# EAGLE board bat-brd-rev02-panel (EAGLE 9.6.2)
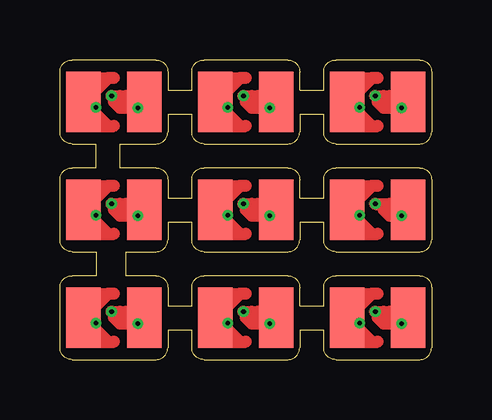
[diagram p0: board, top side]
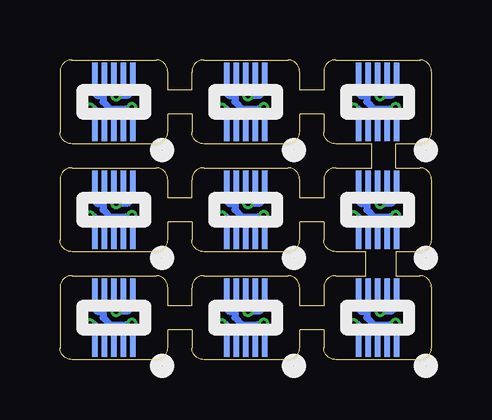
[diagram p1: board, bottom side, seen from below]

Size 15.5 x 12.5 mm. Coordinates in mm from the lower left corner, seen from the top.
Outline: 0.5,0 4,0 arc90 4.5,0.5 4.5,1.25 5.5,1.25 5.5,0.5 arc90 6,0 9.5,0 arc90 10,0.5 10,1.25 11,1.25 11,0.5 arc90 11.5,0 15,0 arc90 15.5,0.5 15.5,3 arc90 15,3.5 11.5,3.5 arc90 11,3 11,2.25 10,2.25 10,3 arc90 9.5,3.5 6,3.5 arc90 5.5,3 5.5,2.25 4.5,2.25 4.5,3 arc90 4,3.5 2.75,3.5 2.75,4.5 4,4.5 arc90 4.5,5 4.5,5.75 5.5,5.75 5.5,5 arc90 6,4.5 9.5,4.5 arc90 10,5 10,5.75 11,5.75 11,5 arc90 11.5,4.5 15,4.5 arc90 15.5,5 15.5,7.5 arc90 15,8 11.5,8 arc90 11,7.5 11,6.75 10,6.75 10,7.5 arc90 9.5,8 6,8 arc90 5.5,7.5 5.5,6.75 4.5,6.75 4.5,7.5 arc90 4,8 2.5,8 2.5,9 4,9 arc90 4.5,9.5 4.5,10.25 5.5,10.25 5.5,9.5 arc90 6,9 9.5,9 arc90 10,9.5 10,10.25 11,10.25 11,9.5 arc90 11.5,9 15,9 arc90 15.5,9.5 15.5,12 arc90 15,12.5 11.5,12.5 arc90 11,12 11,11.25 10,11.25 10,12 arc90 9.5,12.5 6,12.5 arc90 5.5,12 5.5,11.25 4.5,11.25 4.5,12 arc90 4,12.5 0.5,12.5 arc90 0,12 0,9.5 arc90 0.5,9 1.5,9 1.5,8 0.5,8 arc90 0,7.5 0,5 arc90 0.5,4.5 1.5,4.5 1.5,3.5 0.5,3.5 arc90 0,3 0,0.5 arc90 0.5,0
Copper layers (1*16): Top 0.035mm / dielectric 0.53mm / Bottom 0.035mm
Design rules "rules-rev04": minimum track width 5mil, minimum drill 0.2mm, track to track 5mil, track to pad 6mil, pad to pad 6mil, via to via 6mil, smd to smd 6mil, copper to edge 40mil, drill to drill 6mil, minimum pad ring 10mil, minimum via ring 0.125mm, stop-mask expansion 4mil, vias tented up to drill 10000mil, thermal gap 10mil

## Footprints (pad centres in the part's own frame; a part is rotated, then mirrored left to right if it is on the bottom)
1X2_SMD = smd 1.448 x 2.54: 1 -1.27,0; 2 1.27,0
MEZ-DF37C-10DP = smd 0.23 x 1 bottom: P$1 -0.8,-1.14; P$2 -0.4,-1.14; P$3 0,-1.14; P$4 0.4,-1.14; P$5 0.8,-1.14; P$6 0.8,1.14; P$7 0.4,1.14; P$8 0,1.14; P$9 -0.4,1.14; P$10 -0.8,1.14

## Placement (x,y rotation side)
HEDR1  1X02SMD  [1X2_SMD]  2.25,1.75 0 top
HEDR2  1X02SMD  [1X2_SMD]  7.75,1.75 0 top
HEDR3  1X02SMD  [1X2_SMD]  13.25,1.75 0 top
HEDR4  1X02SMD  [1X2_SMD]  2.25,6.25 0 top
HEDR5  1X02SMD  [1X2_SMD]  7.75,6.25 0 top
HEDR6  1X02SMD  [1X2_SMD]  13.25,6.25 0 top
HEDR7  1X02SMD  [1X2_SMD]  2.25,10.75 0 top
HEDR8  1X02SMD  [1X2_SMD]  7.75,10.75 0 top
HEDR9  1X02SMD  [1X2_SMD]  13.25,10.75 0 top
U$1  CON-BAT-TG-MEZ_MALE  [MEZ-DF37C-10DP]  2.25,1.75 0 top
U$2  CON-BAT-TG-MEZ_MALE  [MEZ-DF37C-10DP]  7.75,1.75 0 top
U$3  CON-BAT-TG-MEZ_MALE  [MEZ-DF37C-10DP]  13.25,1.75 0 top
U$4  CON-BAT-TG-MEZ_MALE  [MEZ-DF37C-10DP]  2.25,6.25 0 top
U$5  CON-BAT-TG-MEZ_MALE  [MEZ-DF37C-10DP]  7.75,6.25 0 top
U$6  CON-BAT-TG-MEZ_MALE  [MEZ-DF37C-10DP]  13.25,6.25 0 top
U$7  CON-BAT-TG-MEZ_MALE  [MEZ-DF37C-10DP]  2.25,10.75 0 top
U$8  CON-BAT-TG-MEZ_MALE  [MEZ-DF37C-10DP]  7.75,10.75 0 top
U$9  CON-BAT-TG-MEZ_MALE  [MEZ-DF37C-10DP]  13.25,10.75 0 top

## Library data of the parts
HEDR1-HEDR9 U$1-U$9 = 0TG-Lib v01.5

## Nets
GND: HEDR1.2 U$1.P$4 U$1.P$5 U$1.P$9 U$1.P$10
GND1: HEDR2.2 U$2.P$4 U$2.P$5 U$2.P$9 U$2.P$10
GND2: HEDR3.2 U$3.P$4 U$3.P$5 U$3.P$9 U$3.P$10
GND3: HEDR4.2 U$4.P$4 U$4.P$5 U$4.P$9 U$4.P$10
GND4: HEDR5.2 U$5.P$4 U$5.P$5 U$5.P$9 U$5.P$10
GND5: HEDR6.2 U$6.P$4 U$6.P$5 U$6.P$9 U$6.P$10
GND6: HEDR7.2 U$7.P$4 U$7.P$5 U$7.P$9 U$7.P$10
GND7: HEDR8.2 U$8.P$4 U$8.P$5 U$8.P$9 U$8.P$10
GND8: HEDR9.2 U$9.P$4 U$9.P$5 U$9.P$9 U$9.P$10
VBAT: HEDR1.1 U$1.P$1 U$1.P$2 U$1.P$6 U$1.P$7
VBAT1: HEDR2.1 U$2.P$1 U$2.P$2 U$2.P$6 U$2.P$7
VBAT2: HEDR3.1 U$3.P$1 U$3.P$2 U$3.P$6 U$3.P$7
VBAT3: HEDR4.1 U$4.P$1 U$4.P$2 U$4.P$6 U$4.P$7
VBAT4: HEDR5.1 U$5.P$1 U$5.P$2 U$5.P$6 U$5.P$7
VBAT5: HEDR6.1 U$6.P$1 U$6.P$2 U$6.P$6 U$6.P$7
VBAT6: HEDR7.1 U$7.P$1 U$7.P$2 U$7.P$6 U$7.P$7
VBAT7: HEDR8.1 U$8.P$1 U$8.P$2 U$8.P$6 U$8.P$7
VBAT8: HEDR9.1 U$9.P$1 U$9.P$2 U$9.P$6 U$9.P$7

## Tracks (layer width: path | path; a pad name or v marks a point on that pad's centre or on a via)
GND  (via drill 0.2)
  Top 0.2: 3.27,2 3.27,1.75 | 3.27,1.75 3.27,1.52 v3.25,1.5 | HEDR1.2 3.27,1.75
  Top 0.5: v2.15,2 3.27,2
  Bottom 0.2: U$1.P$9 1.85,2.3 v2.15,2 1.65,2 1.45,2.2 U$1.P$10 | U$1.P$5 3.05,1.3 v3.25,1.5 3.05,1.5 2.65,1.1 U$1.P$4
GND1  (via drill 0.2)
  Top 0.2: 8.77,2 8.77,1.75 | 8.77,1.75 8.77,1.52 v8.75,1.5 | HEDR2.2 8.77,1.75
  Top 0.5: v7.65,2 8.77,2
  Bottom 0.2: U$2.P$9 7.35,2.3 v7.65,2 7.15,2 6.95,2.2 U$2.P$10 | U$2.P$5 8.55,1.3 v8.75,1.5 8.55,1.5 8.15,1.1 U$2.P$4
GND2  (via drill 0.2)
  Top 0.2: 14.27,2 14.27,1.75 | 14.27,1.75 14.27,1.52 v14.25,1.5 | HEDR3.2 14.27,1.75
  Top 0.5: v13.15,2 14.27,2
  Bottom 0.2: U$3.P$9 12.85,2.3 v13.15,2 12.65,2 12.45,2.2 U$3.P$10 | U$3.P$5 14.05,1.3 v14.25,1.5 14.05,1.5 13.65,1.1 U$3.P$4
GND3  (via drill 0.2)
  Top 0.2: 3.27,6.5 3.27,6.25 | 3.27,6.25 3.27,6.02 v3.25,6 | HEDR4.2 3.27,6.25
  Top 0.5: v2.15,6.5 3.27,6.5
  Bottom 0.2: U$4.P$9 1.85,6.8 v2.15,6.5 1.65,6.5 1.45,6.7 U$4.P$10 | U$4.P$5 3.05,5.8 v3.25,6 3.05,6 2.65,5.6 U$4.P$4
GND4  (via drill 0.2)
  Top 0.2: 8.77,6.5 8.77,6.25 | 8.77,6.25 8.77,6.02 v8.75,6 | HEDR5.2 8.77,6.25
  Top 0.5: v7.65,6.5 8.77,6.5
  Bottom 0.2: U$5.P$9 7.35,6.8 v7.65,6.5 7.15,6.5 6.95,6.7 U$5.P$10 | U$5.P$5 8.55,5.8 v8.75,6 8.55,6 8.15,5.6 U$5.P$4
GND5  (via drill 0.2)
  Top 0.2: 14.27,6.5 14.27,6.25 | 14.27,6.25 14.27,6.02 v14.25,6 | HEDR6.2 14.27,6.25
  Top 0.5: v13.15,6.5 14.27,6.5
  Bottom 0.2: U$6.P$9 12.85,6.8 v13.15,6.5 12.65,6.5 12.45,6.7 U$6.P$10 | U$6.P$5 14.05,5.8 v14.25,6 14.05,6 13.65,5.6 U$6.P$4
GND6  (via drill 0.2)
  Top 0.2: 3.27,11 3.27,10.75 | 3.27,10.75 3.27,10.52 v3.25,10.5 | HEDR7.2 3.27,10.75
  Top 0.5: v2.15,11 3.27,11
  Bottom 0.2: U$7.P$9 1.85,11.3 v2.15,11 1.65,11 1.45,11.2 U$7.P$10 | U$7.P$5 3.05,10.3 v3.25,10.5 3.05,10.5 2.65,10.1 U$7.P$4
GND7  (via drill 0.2)
  Top 0.2: 8.77,11 8.77,10.75 | 8.77,10.75 8.77,10.52 v8.75,10.5 | HEDR8.2 8.77,10.75
  Top 0.5: v7.65,11 8.77,11
  Bottom 0.2: U$8.P$9 7.35,11.3 v7.65,11 7.15,11 6.95,11.2 U$8.P$10 | U$8.P$5 8.55,10.3 v8.75,10.5 8.55,10.5 8.15,10.1 U$8.P$4
GND8  (via drill 0.2)
  Top 0.2: 14.27,11 14.27,10.75 | 14.27,10.75 14.27,10.52 v14.25,10.5 | HEDR9.2 14.27,10.75
  Top 0.5: v13.15,11 14.27,11
  Bottom 0.2: U$9.P$9 12.85,11.3 v13.15,11 12.65,11 12.45,11.2 U$9.P$10 | U$9.P$5 14.05,10.3 v14.25,10.5 14.05,10.5 13.65,10.1 U$9.P$4
S$1
  Top 0.5: 2.25,7.25 2,7.25 | 2,7.25 1,6.25 | 1,6.25 2,5.25 | 2,5.25 2.25,5.25 | 1,6.25 1,5.75 1.5,5.25 2,5.25 | 1,6.25 1,6.75 1.5,7.25 2,7.25
S$2
  Top 0.5: 2.25,2.75 2,2.75 | 2,2.75 1,1.75 | 1,1.75 2,0.75 | 2,0.75 2.25,0.75 | 1,1.75 1,1.25 1.5,0.75 2,0.75 | 1,1.75 1,2.25 1.5,2.75 2,2.75
S$3
  Top 0.5: 2.25,11.75 2,11.75 | 2,11.75 1,10.75 | 1,10.75 2,9.75 | 2,9.75 2.25,9.75 | 1,10.75 1,10.25 1.5,9.75 2,9.75 | 1,10.75 1,11.25 1.5,11.75 2,11.75
S$4
  Top 0.5: 7.75,11.75 7.5,11.75 | 7.5,11.75 6.5,10.75 | 6.5,10.75 7.5,9.75 | 7.5,9.75 7.75,9.75 | 6.5,10.75 6.5,10.25 7,9.75 7.5,9.75 | 6.5,10.75 6.5,11.25 7,11.75 7.5,11.75
S$5
  Top 0.5: 7.75,7.25 7.5,7.25 | 7.5,7.25 6.5,6.25 | 6.5,6.25 7.5,5.25 | 7.5,5.25 7.75,5.25 | 6.5,6.25 6.5,5.75 7,5.25 7.5,5.25 | 6.5,6.25 6.5,6.75 7,7.25 7.5,7.25
S$6
  Top 0.5: 7.75,2.75 7.5,2.75 | 7.5,2.75 6.5,1.75 | 6.5,1.75 7.5,0.75 | 7.5,0.75 7.75,0.75 | 6.5,1.75 6.5,1.25 7,0.75 7.5,0.75 | 6.5,1.75 6.5,2.25 7,2.75 7.5,2.75
S$7
  Top 0.5: 13.25,2.75 13,2.75 | 13,2.75 12,1.75 | 12,1.75 13,0.75 | 13,0.75 13.25,0.75 | 12,1.75 12,1.25 12.5,0.75 13,0.75 | 12,1.75 12,2.25 12.5,2.75 13,2.75
S$8
  Top 0.5: 13.25,7.25 13,7.25 | 13,7.25 12,6.25 | 12,6.25 13,5.25 | 13,5.25 13.25,5.25 | 12,6.25 12,5.75 12.5,5.25 13,5.25 | 12,6.25 12,6.75 12.5,7.25 13,7.25
S$9
  Top 0.5: 13.25,11.75 13,11.75 | 13,11.75 12,10.75 | 12,10.75 13,9.75 | 13,9.75 13.25,9.75 | 12,10.75 12,10.25 12.5,9.75 13,9.75 | 12,10.75 12,11.25 12.5,11.75 13,11.75
S$12
  Top 0.5: 2.75,1.5 2.5,1.5 2.25,1.75 2.5,2 2.75,2 2.75,1.5
S$13
  Top 0.5: 2.75,6 2.5,6 2.25,6.25 2.5,6.5 2.75,6.5 2.75,6
S$14
  Top 0.5: 2.75,10.5 2.5,10.5 2.25,10.75 2.5,11 2.75,11 2.75,10.5
S$15
  Top 0.5: 8.25,10.5 8,10.5 7.75,10.75 8,11 8.25,11 8.25,10.5
S$16
  Top 0.5: 13.75,10.5 13.5,10.5 13.25,10.75 13.5,11 13.75,11 13.75,10.5
S$17
  Top 0.5: 14,6 13.75,6 13.5,6.25 13.75,6.5 14,6.5 14,6
S$18
  Top 0.5: 8.25,6 8,6 7.75,6.25 8,6.5 8.25,6.5 8.25,6
S$19
  Top 0.5: 8.25,1.5 8,1.5 7.75,1.75 8,2 8.25,2 8.25,1.5
S$20
  Top 0.5: 13.75,1.5 13.5,1.5 13.25,1.75 13.5,2 13.75,2 13.75,1.5
VBAT  (via drill 0.2)
  Top 0.2: HEDR1.1 1.27,1.75 v1.5,1.52
  Bottom 0.2: U$1.P$7 2.65,1.98 2.7,1.98 2.95,1.98 3.05,2.08 U$1.P$6 | U$1.P$1 1.45,1.47 v1.5,1.52 | U$1.P$2 1.85,1.35 1.75,1.45
  Bottom 0.3: 2.7,1.98 2.7,1.75 2.4,1.45 1.75,1.45 1.57,1.45 v1.5,1.52
VBAT1  (via drill 0.2)
  Top 0.2: HEDR2.1 6.77,1.75 v7,1.52
  Bottom 0.2: U$2.P$7 8.15,1.98 8.2,1.98 8.45,1.98 8.55,2.08 U$2.P$6 | U$2.P$1 6.95,1.47 v7,1.52 | U$2.P$2 7.35,1.35 7.25,1.45
  Bottom 0.3: 8.2,1.98 8.2,1.75 7.9,1.45 7.25,1.45 7.07,1.45 v7,1.52
VBAT2  (via drill 0.2)
  Top 0.2: HEDR3.1 12.27,1.75 v12.5,1.52
  Bottom 0.2: U$3.P$7 13.65,1.98 13.7,1.98 13.95,1.98 14.05,2.08 U$3.P$6 | U$3.P$1 12.45,1.47 v12.5,1.52 | U$3.P$2 12.85,1.35 12.75,1.45
  Bottom 0.3: 13.7,1.98 13.7,1.75 13.4,1.45 12.75,1.45 12.57,1.45 v12.5,1.52
VBAT3  (via drill 0.2)
  Top 0.2: HEDR4.1 1.27,6.25 v1.5,6.02
  Bottom 0.2: U$4.P$7 2.65,6.47 2.7,6.47 2.95,6.47 3.05,6.58 U$4.P$6 | U$4.P$1 1.45,5.97 v1.5,6.02 | U$4.P$2 1.85,5.85 1.75,5.95
  Bottom 0.3: 2.7,6.47 2.7,6.25 2.4,5.95 1.75,5.95 1.57,5.95 v1.5,6.02
VBAT4  (via drill 0.2)
  Top 0.2: HEDR5.1 6.77,6.25 v7,6.02
  Bottom 0.2: U$5.P$7 8.15,6.47 8.2,6.47 8.45,6.47 8.55,6.58 U$5.P$6 | U$5.P$1 6.95,5.97 v7,6.02 | U$5.P$2 7.35,5.85 7.25,5.95
  Bottom 0.3: 8.2,6.47 8.2,6.25 7.9,5.95 7.25,5.95 7.07,5.95 v7,6.02
VBAT5  (via drill 0.2)
  Top 0.2: HEDR6.1 12.27,6.25 v12.5,6.02
  Bottom 0.2: U$6.P$7 13.65,6.47 13.7,6.47 13.95,6.47 14.05,6.58 U$6.P$6 | U$6.P$1 12.45,5.97 v12.5,6.02 | U$6.P$2 12.85,5.85 12.75,5.95
  Bottom 0.3: 13.7,6.47 13.7,6.25 13.4,5.95 12.75,5.95 12.57,5.95 v12.5,6.02
VBAT6  (via drill 0.2)
  Top 0.2: HEDR7.1 1.27,10.75 v1.5,10.52
  Bottom 0.2: U$7.P$7 2.65,10.97 2.7,10.97 2.95,10.97 3.05,11.07 U$7.P$6 | U$7.P$1 1.45,10.47 v1.5,10.52 | U$7.P$2 1.85,10.35 1.75,10.45
  Bottom 0.3: 2.7,10.97 2.7,10.75 2.4,10.45 1.75,10.45 1.57,10.45 v1.5,10.52
VBAT7  (via drill 0.2)
  Top 0.2: HEDR8.1 6.77,10.75 v7,10.52
  Bottom 0.2: U$8.P$7 8.15,10.97 8.2,10.97 8.45,10.97 8.55,11.07 U$8.P$6 | U$8.P$1 6.95,10.47 v7,10.52 | U$8.P$2 7.35,10.35 7.25,10.45
  Bottom 0.3: 8.2,10.97 8.2,10.75 7.9,10.45 7.25,10.45 7.07,10.45 v7,10.52
VBAT8  (via drill 0.2)
  Top 0.2: HEDR9.1 12.27,10.75 v12.5,10.52
  Bottom 0.2: U$9.P$7 13.65,10.97 13.7,10.97 13.95,10.97 14.05,11.07 U$9.P$6 | U$9.P$1 12.45,10.47 v12.5,10.52 | U$9.P$2 12.85,10.35 12.75,10.45
  Bottom 0.3: 13.7,10.97 13.7,10.75 13.4,10.45 12.75,10.45 12.57,10.45 v12.5,10.52